# Altium PCB FLS HAMAMATSU_A Aug_14_2012.PcbDoc
Units mil, origin at the board's own origin, x right, y up, seen from the top; angles counter-clockwise.
Board outline 1329 x 1480 mil, 6 copper layers (Top Layer, Internal Plane 1, Mid-Layer 1, Mid-Layer 2, Internal Plane 2, Bottom Layer); 30 components, 21 nets, 94 pads, 5 vias.
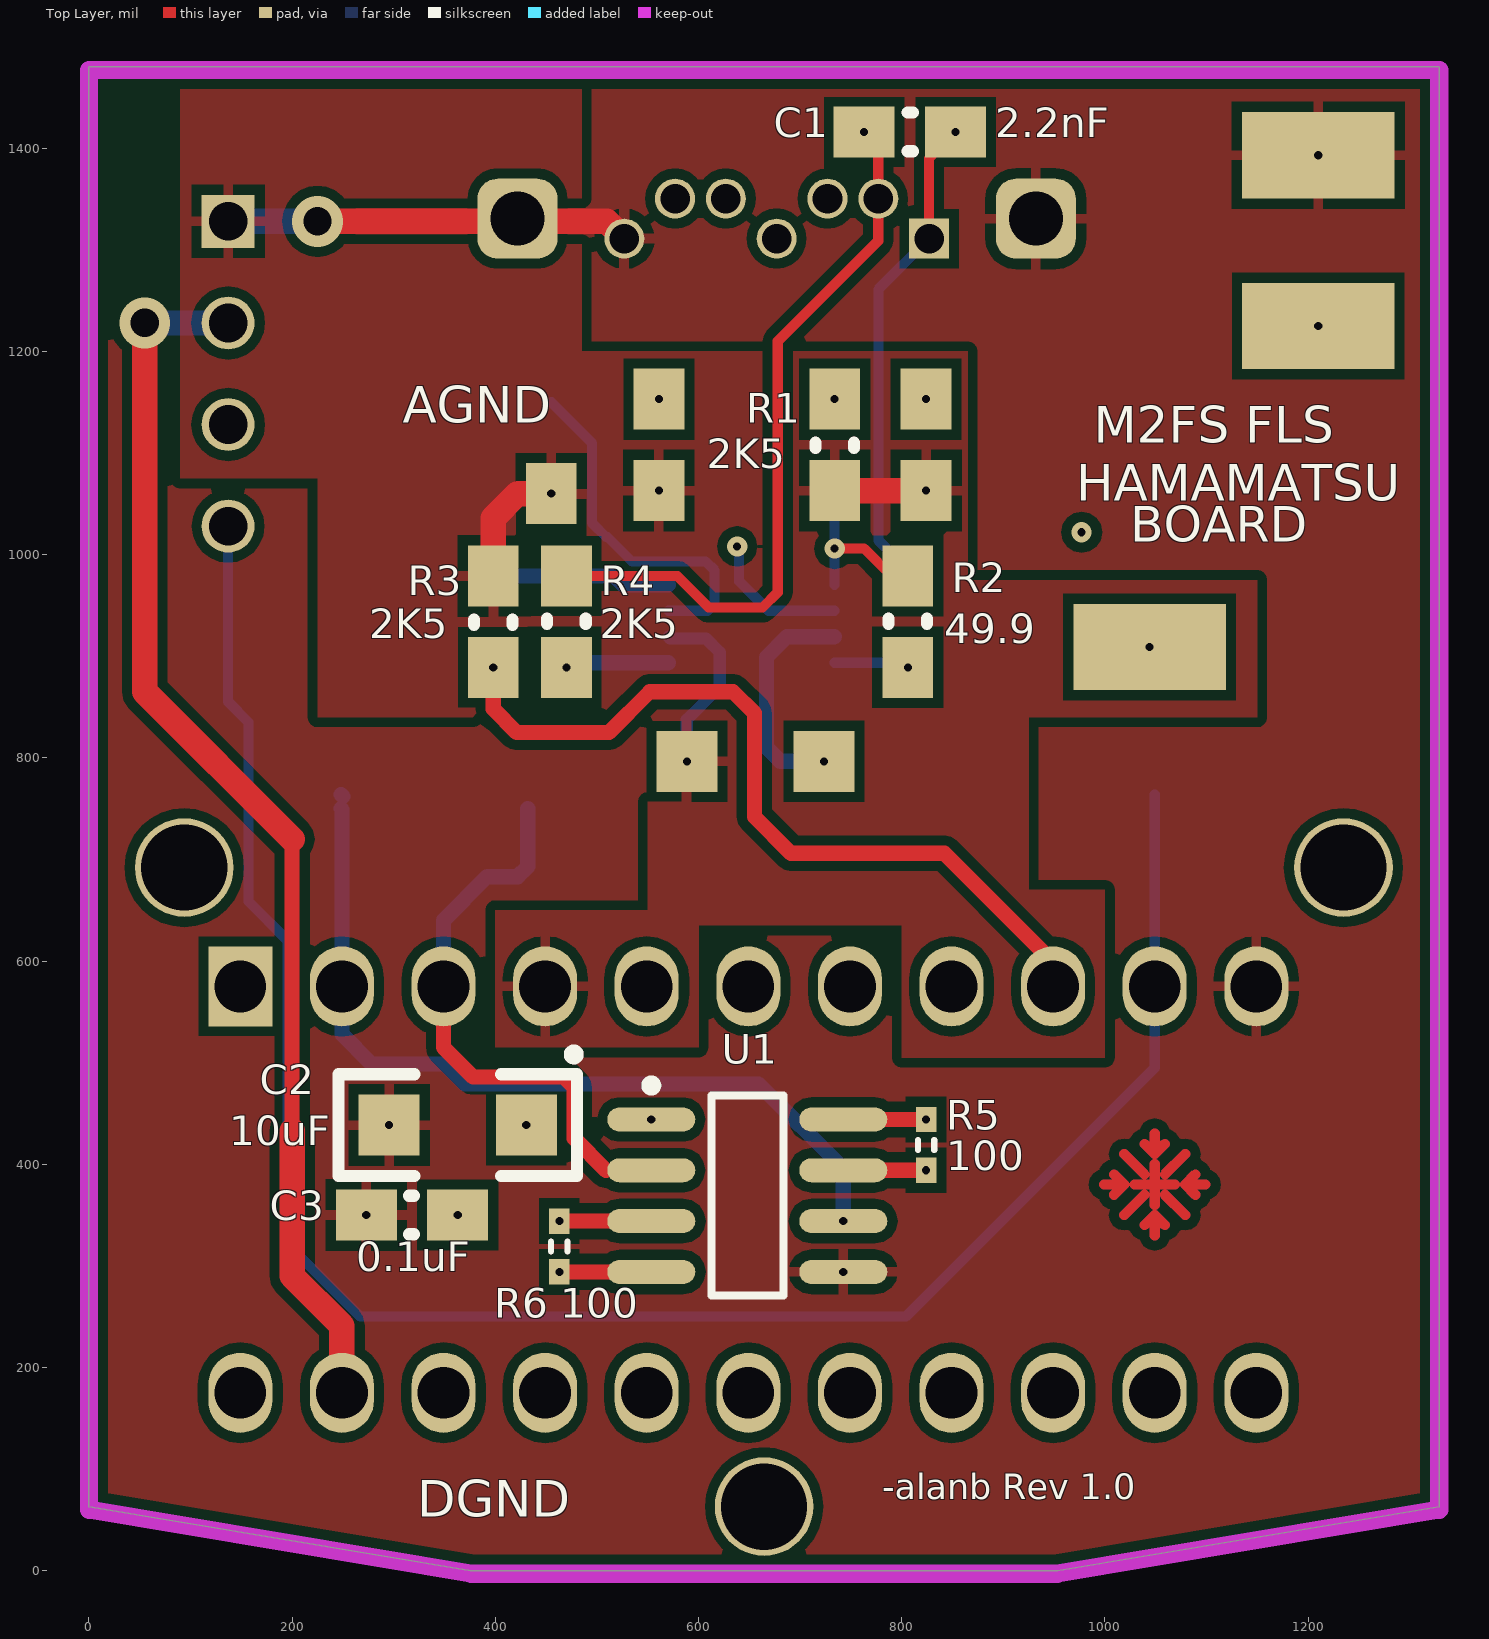
[diagram p0: Top Layer view]
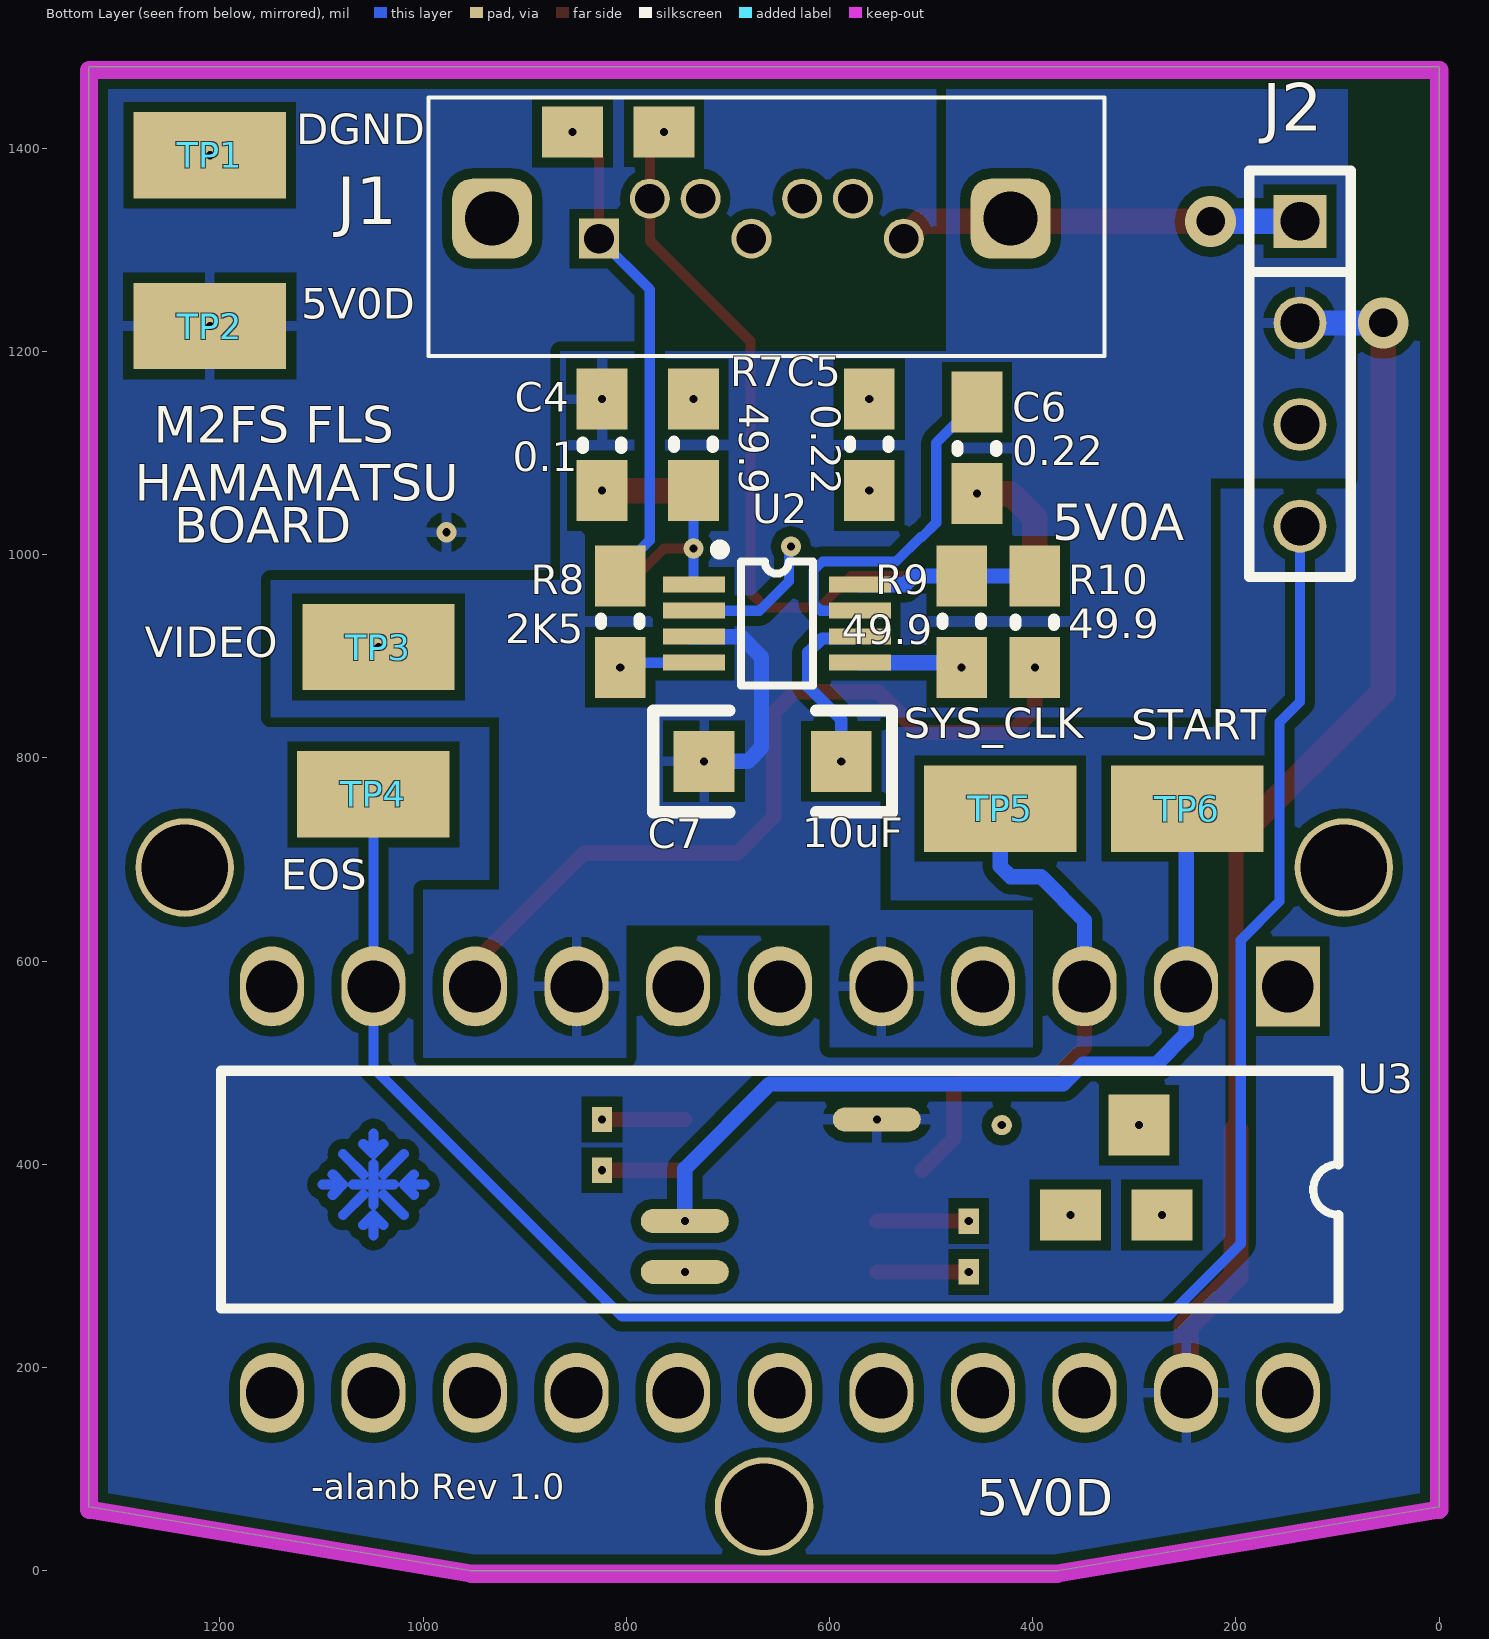
[diagram p1: Bottom Layer view, seen from below]
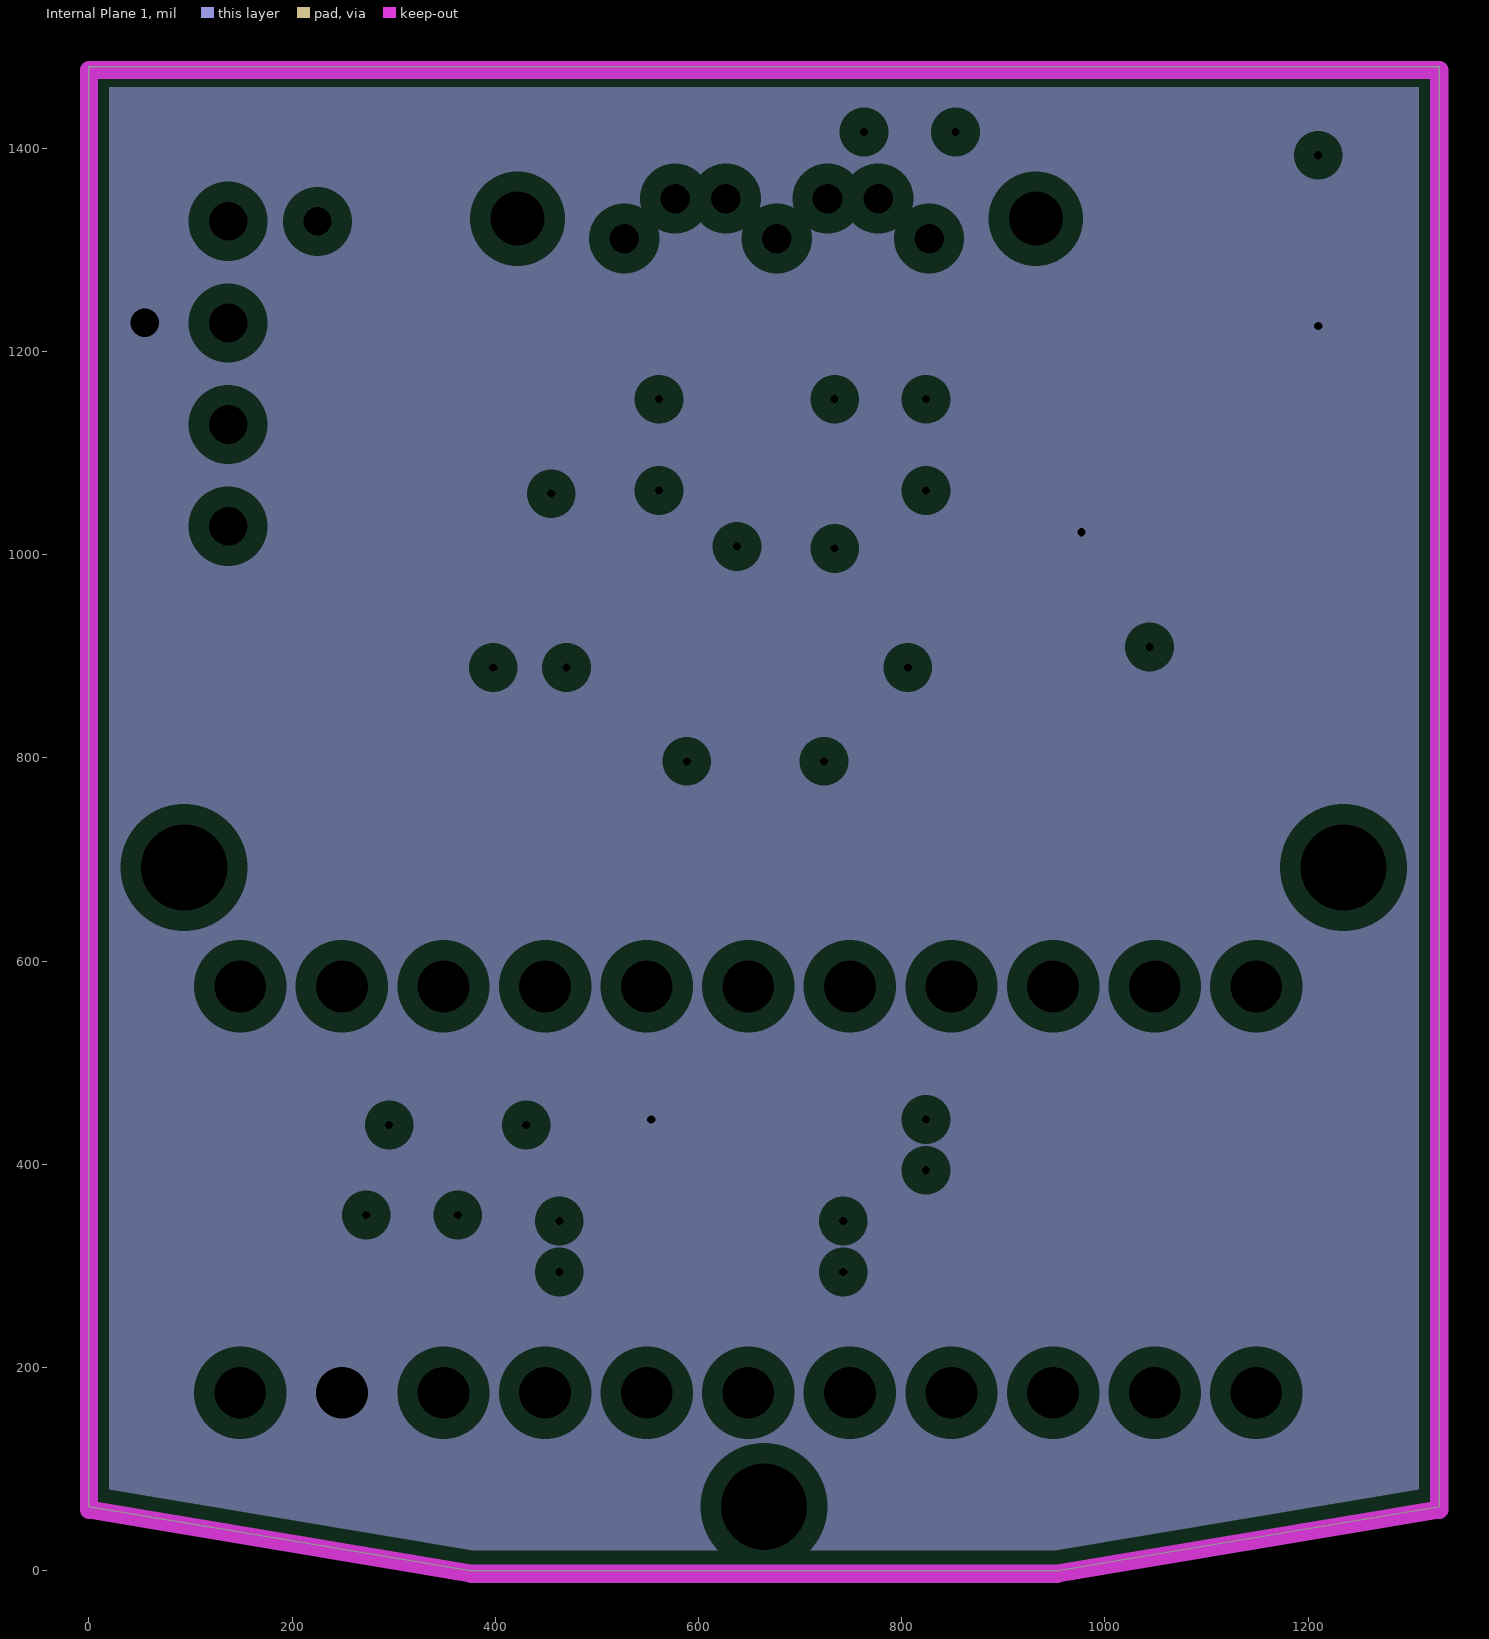
[diagram p2: Internal Plane 1, clearances drawn from the general rule]
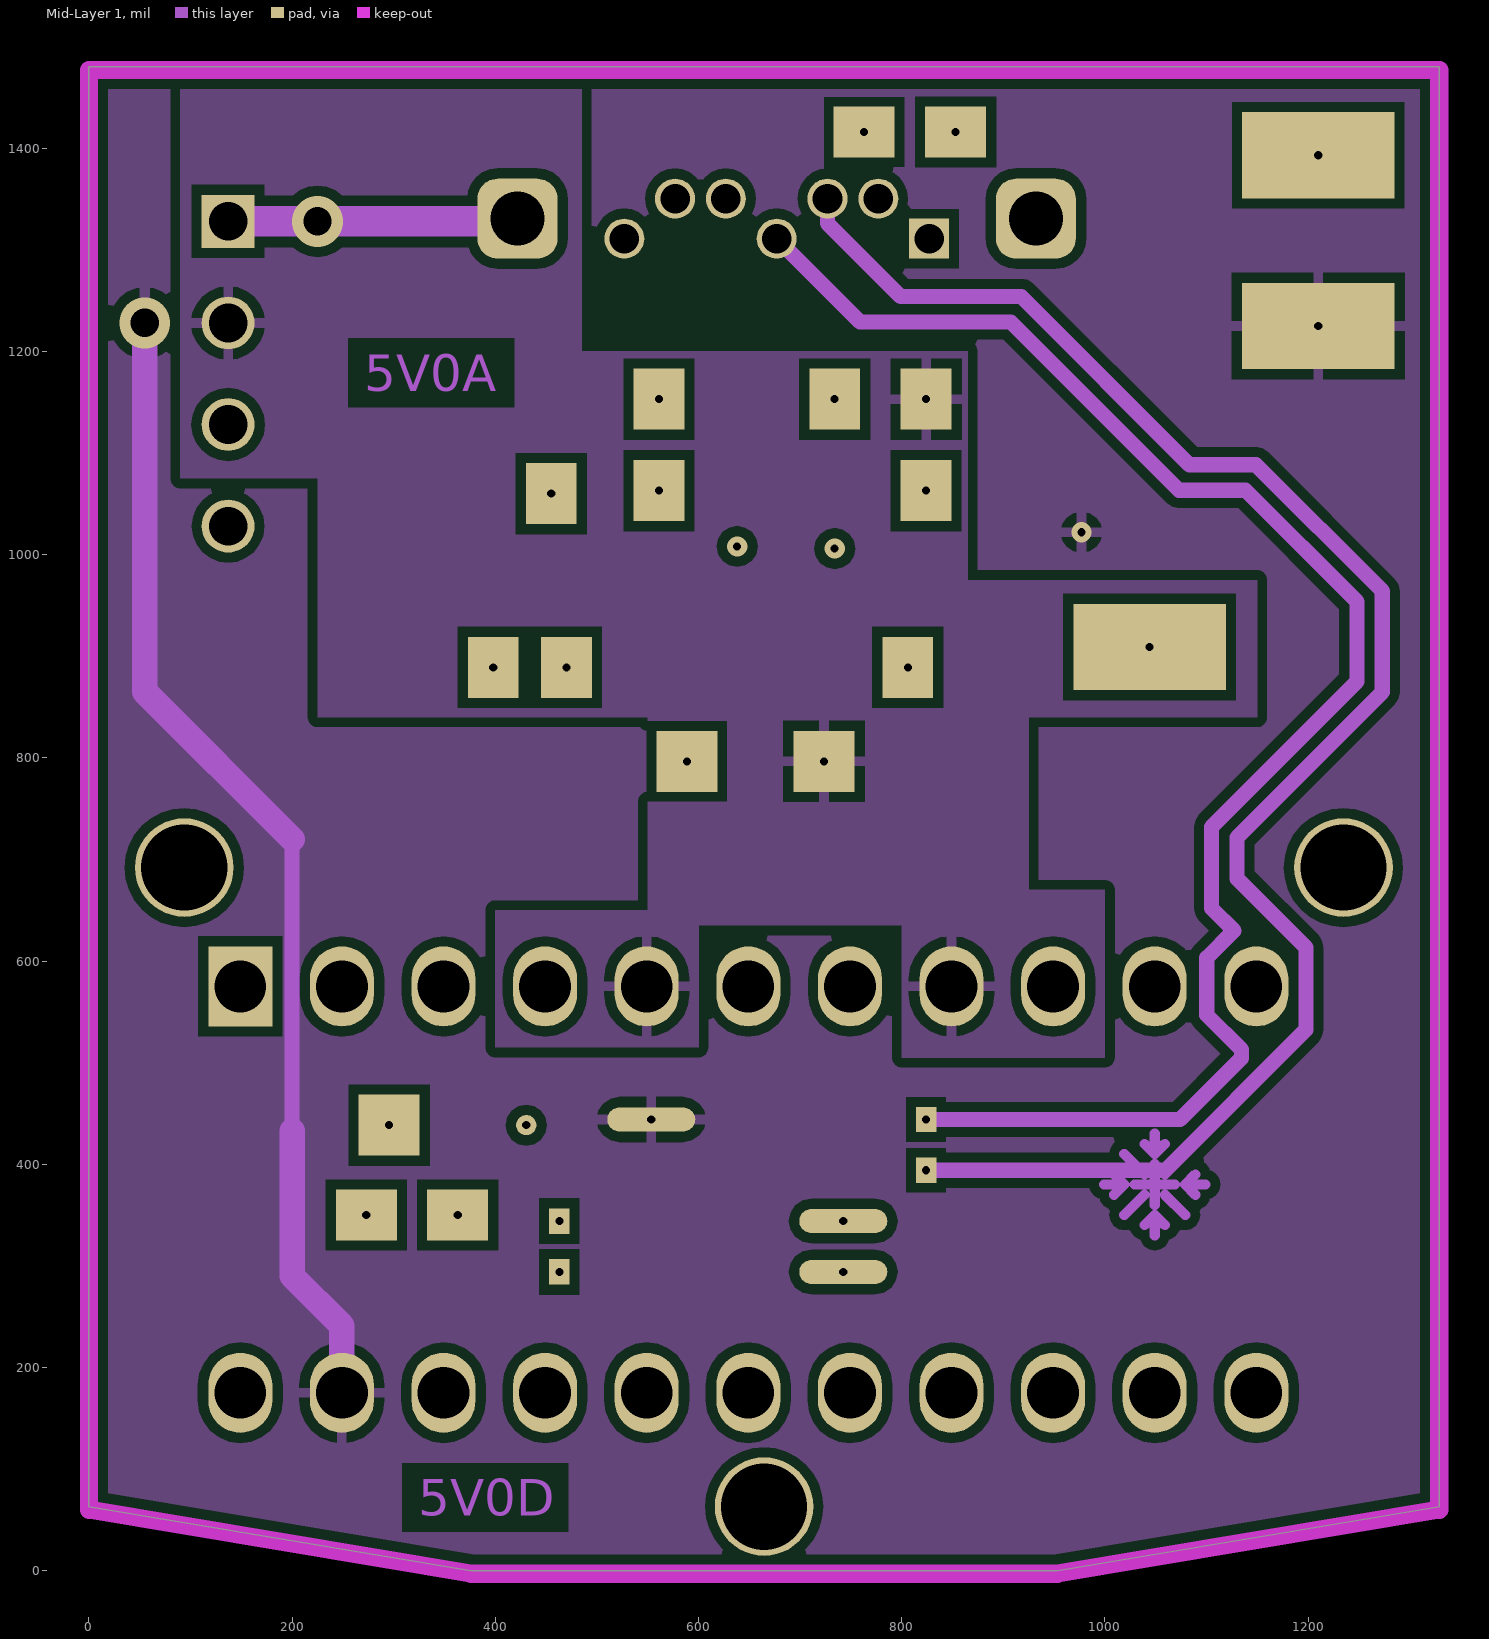
[diagram p3: Mid-Layer 1]
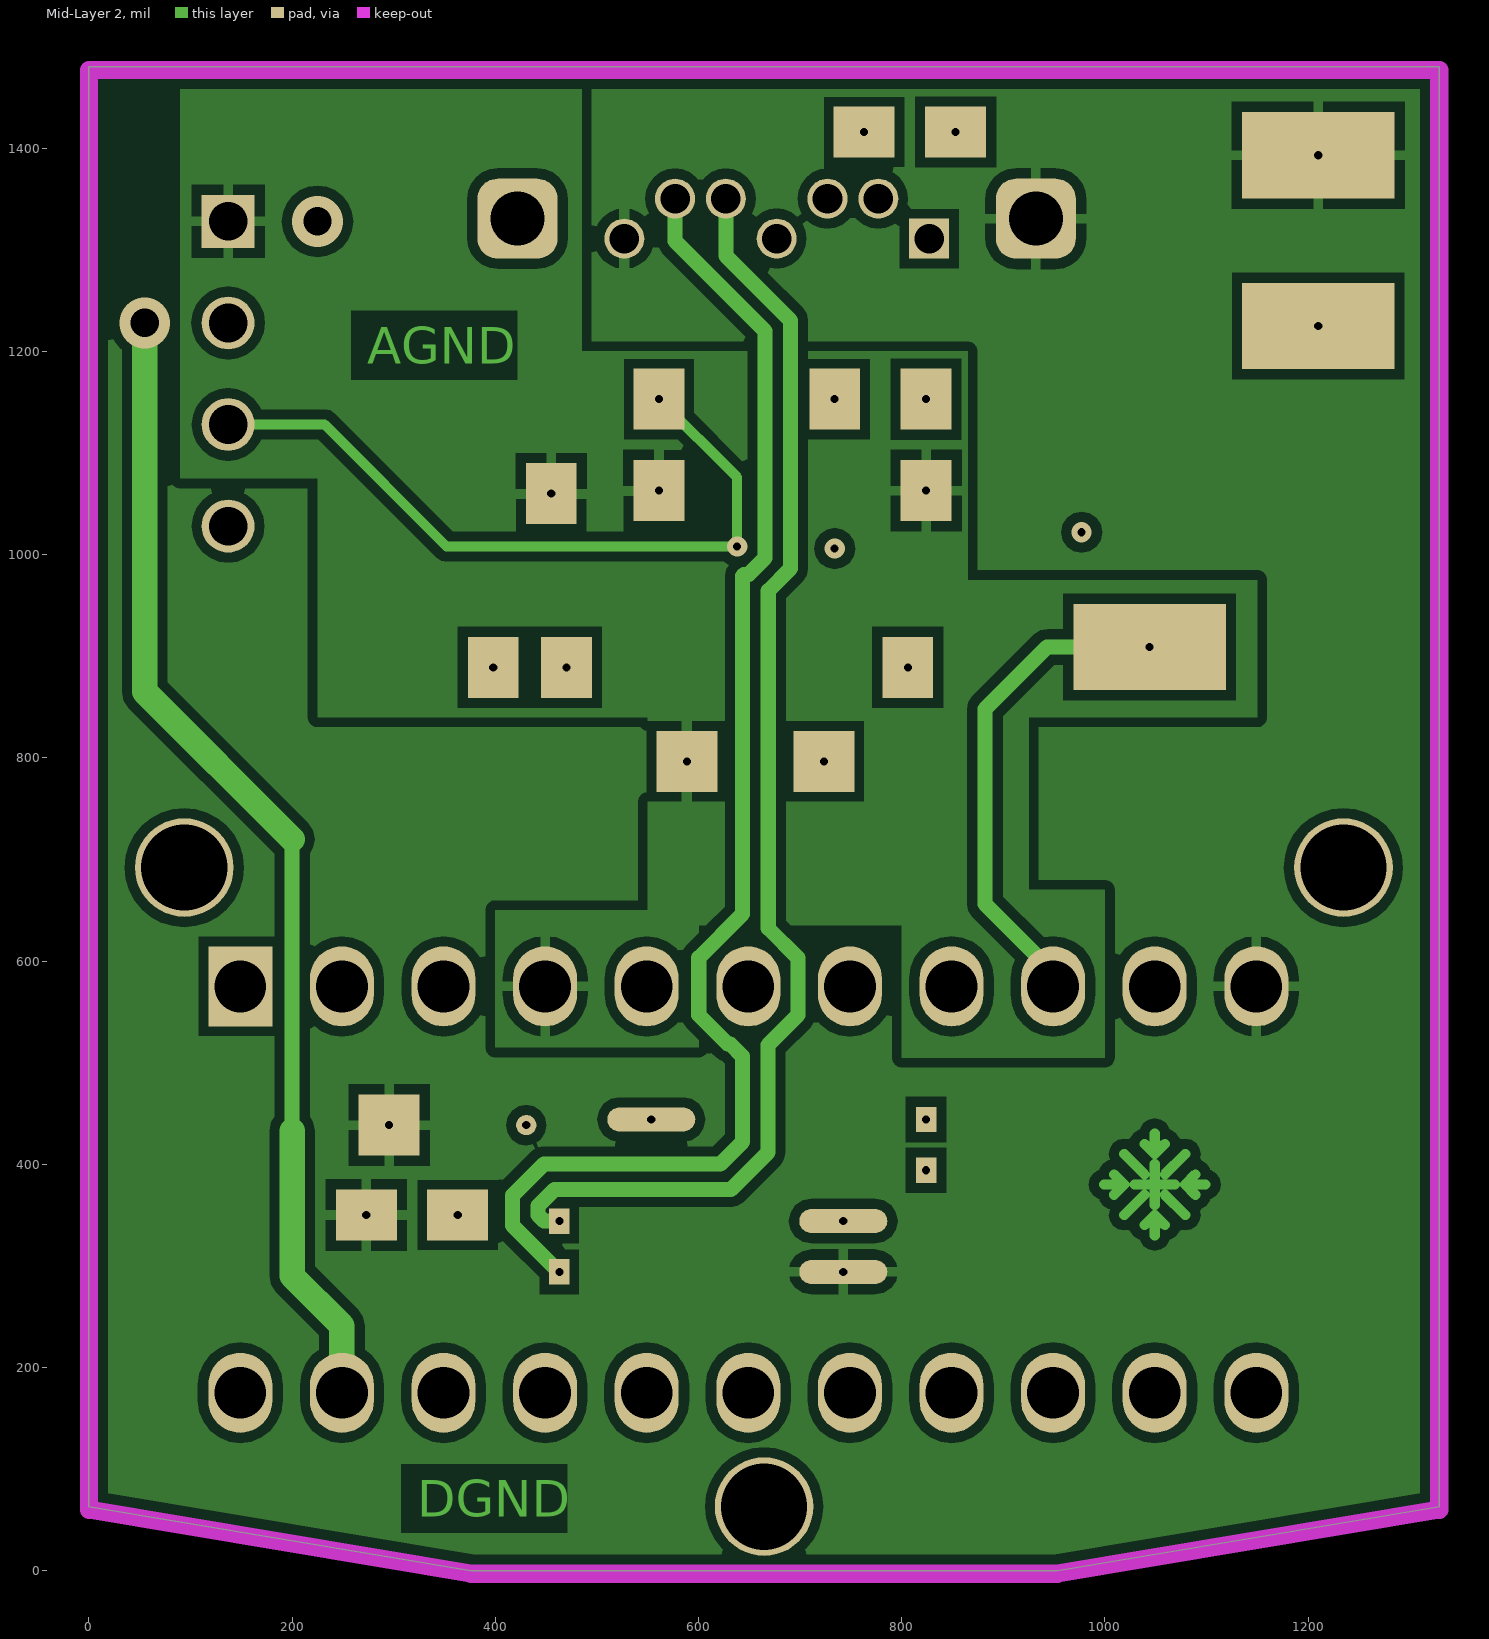
[diagram p4: Mid-Layer 2]
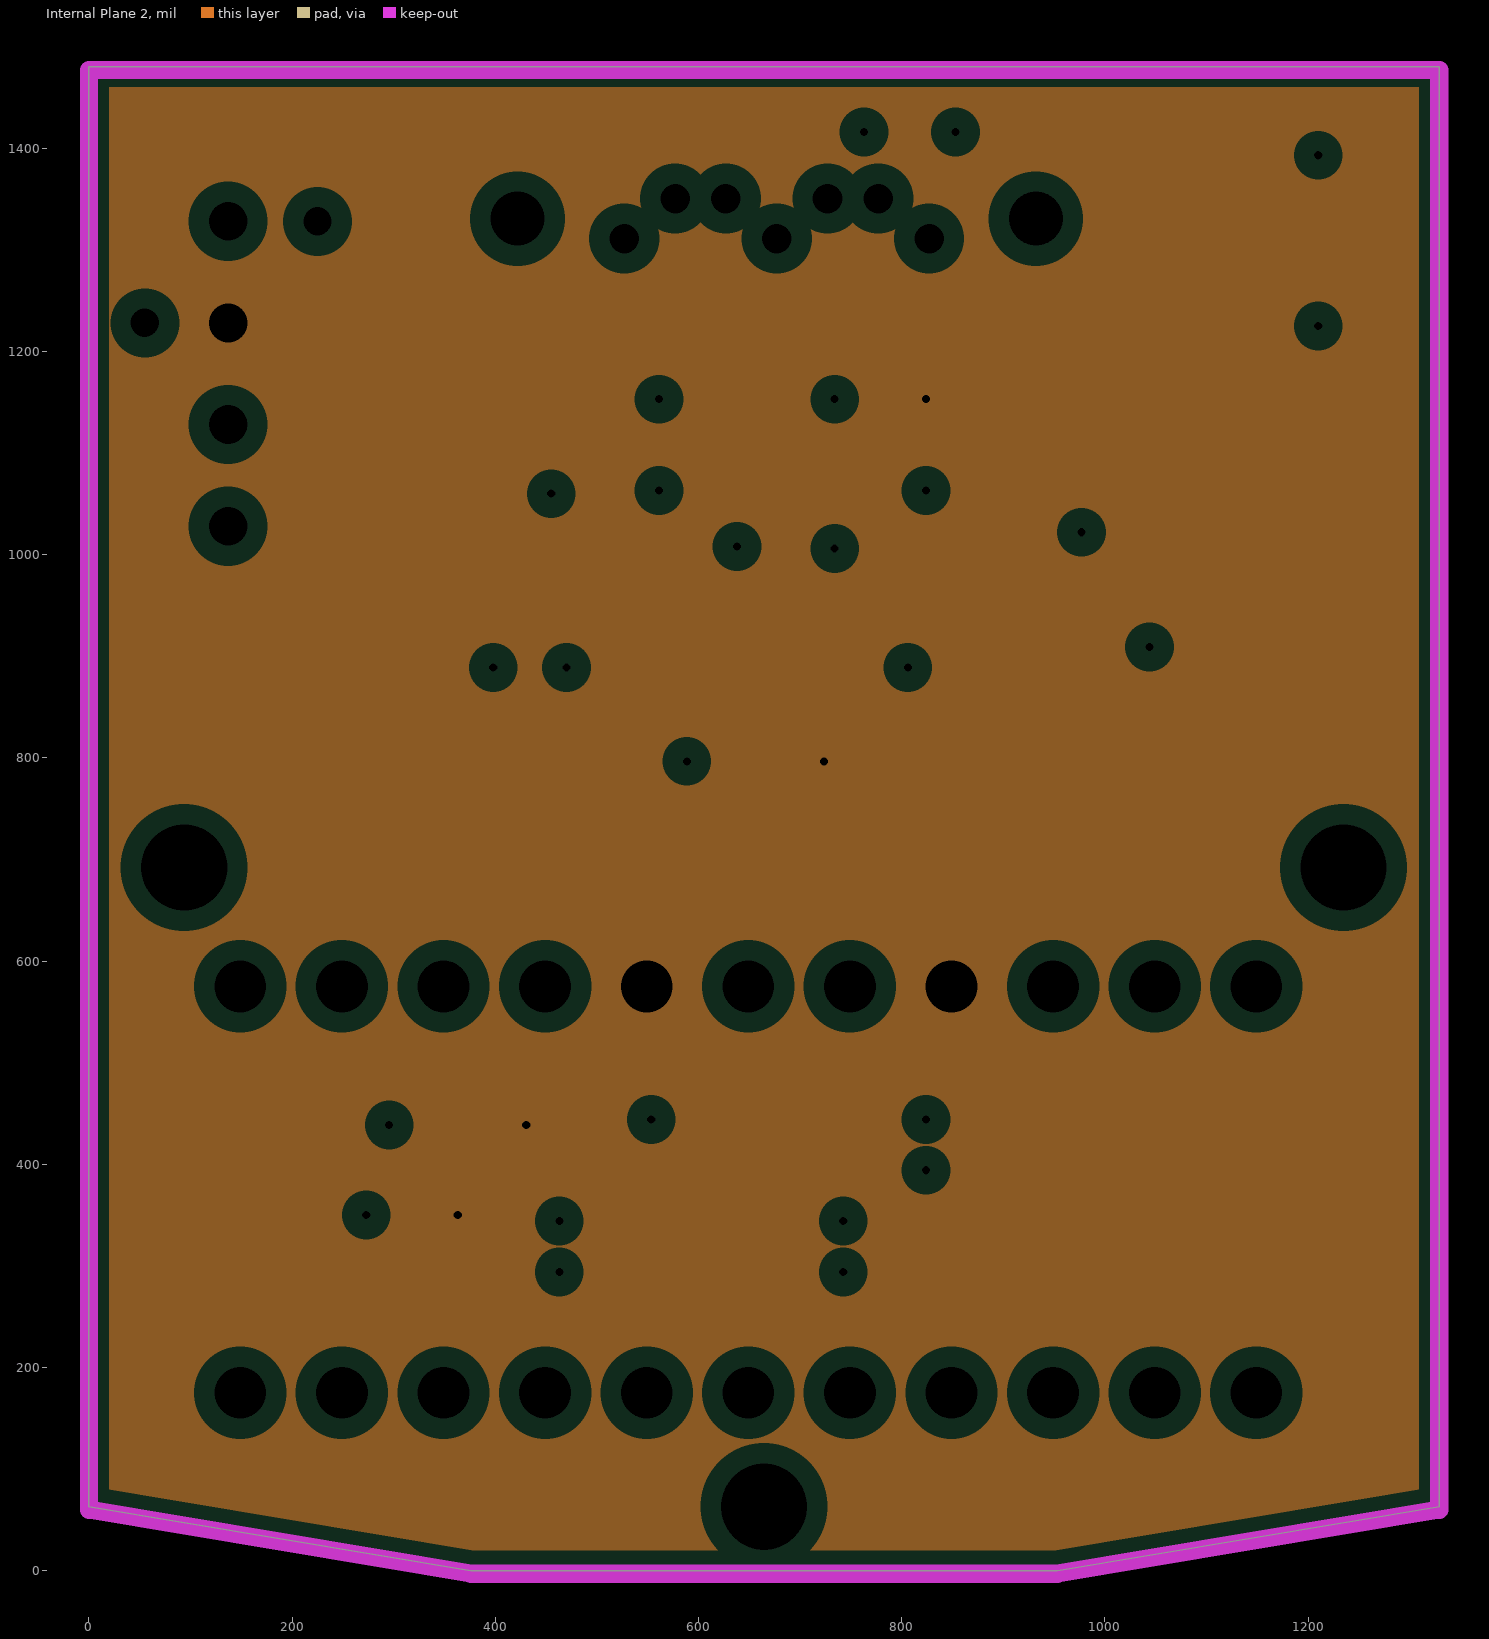
[diagram p5: Internal Plane 2, clearances drawn from the general rule]

## Layer stack, top to bottom
Top Layer: signal copper 1.4
Dielectric: core 12.6, FR-4, Dk 4.8
Internal Plane 1: plane copper 1.4, net 5V0D
Dielectric: prepreg 12.6, FR-4, Dk 4.8
Mid-Layer 1: signal copper 1.4
Dielectric: core 12.6, FR-4, Dk 4.8
Mid-Layer 2: signal copper 1.4
Dielectric: prepreg 12.6, FR-4, Dk 4.8
Internal Plane 2: plane copper 1.4, net 5V0A
Dielectric: core 12.6, FR-4, Dk 4.8
Bottom Layer: signal copper 1.4

## Board outline
0,63 376,0 953,0 1329,63 1329,1480 0,1480

## Design rules (kind name [scope] priority, off if disabled: settings)
Clearance [All] p1: gap=9.8
DiffPairsRouting [All] p1: maxlimit=10 minlimit=10 mostfreqgap=10 maxuncoupledlength=500
MinimumSolderMaskSliver [All] p1: minsoldermaskwidth=2
PlaneClearance [All] p1: clearance=20
PlaneConnect [All] p1: planeconnectstyle=Relief reliefexpansion=20 reliefentries=4 reliefconductorwidth=10 reliefairgap=10
PolygonConnect [All] p1: connectstyle=Relief reliefconductorwidth=10 reliefentries=4 polygonreliefangle="90 Angle" airgapwidth=10
RoutingVias [All] p1: holewidth=28 width=50 viastyle="Through Hole" minholewidth=28 minwidth=50 maxholewidth=28 maxwidth=50
ShortCircuit ShortCircuit_2 [InNet('AGND') vs InNet('DGND')] p1: allowed=TRUE
ShortCircuit [InNet('5V0A') vs InNet('5V0D')] p2: allowed=TRUE
SilkscreenOverComponentPads [All] p1: minsilkscreentomaskgap=2
SolderMaskExpansion [All] p1: expansion=4
Width [All] p1: maxlimit=30 minlimit=6 preferedwidth=10
22 further rules are at their usual default settings.

## Classes and differential pairs
differential pair "VIDEO A1": +"VIDEO A1_P" -"VIDEO A1_N"
differential pair SYS_CLK_A1: +SYS_CLK_A1_P -SYS_CLK_A1_N
differential pair START_A1: +START_A1_P -START_A1_N

## Components (designator, comment, footprint, x,y, rotation, side; value= is the part's Value field where it differs from the comment)
C1 "2.2nF" "0805 SLIM"#1 853,1416 r180 top locked (schematic designator C2)
C2 "10uF" 1206#1 363,439 r270 top locked (schematic designator C5)
C3 "0.1uF" "0805 SLIM"#1 273,350 r0 top locked (schematic designator C6)
C4 "0.1" "0805 SLIM"#1 824,1063 r90 bottom locked (schematic designator C7)
C5 "0.22" "0805 SLIM"#1 561,1153 r270 bottom (schematic designator C1)
C6 "0.22" "0805 SLIM"#2 455,1060 r90 bottom locked (schematic designator C3)
C7 "10uF" 1206#2 656,796 r90 bottom locked (schematic designator C4)
J1 "" "Molex 471554001" 932.04,1330.68 r180 bottom locked
J2 "WM6438-ND" SIP4 137,1328 r270 bottom locked
R1 "2K5" "0805 SLIM"#3 734,1063 r90 top locked (schematic designator R2)
R2 "49.9" "0805 SLIM"#3 806,979 r270 top locked (schematic designator R1)
R3 "2K5" "0805 SLIM"#4 398,889 r90 top locked (schematic designator R7)
R4 "2K5" "0805 SLIM"#3 470,979 r270 top locked (schematic designator R5)
R5 "100" "0402 slim" 824,444 r270 top locked (schematic designator R10)
R6 "100" "0402 SLIM" 463,294 r90 top locked (schematic designator R9)
R7 "49.9" "0805 SLIM"#4 734,1153 r270 bottom locked (schematic designator R4)
R8 "2K5" "0805 SLIM"#4 806,979 r270 bottom locked (schematic designator R3)
R9 "49.9" "0805 SLIM"#4 470,979 r270 bottom locked (schematic designator R8)
R10 "49.9" "0805 SLIM"#2 398,889 r90 bottom locked (schematic designator R6)
TP1 "DGND" TP-107#1 1210,1393 r0 bottom locked
TP2 "5V0D" TP-107#1 1210,1225 r0 bottom locked
TP3 "VIDEO" TP-107#1 1044,909 r0 bottom locked
TP4 "EOS" TP-107#2 960,680 r0 bottom locked
TP5 "SYS_CLK" TP-107#3 432,764 r0 bottom locked
TP6 "START" TP-107#4 248,763 r0 bottom locked
U1 "DS90C402M" M08A_N 648,369 r0 top locked (schematic designator U3)
U2 "TI THS4521" MSOP8 652,932 r270 bottom locked
U3 "Hamamatsu S10453-512Q" "HAMAMATSU 22" 149,575 r270 bottom locked (schematic designator U1)
? "" STARFLAKE 1049,380 r0 bottom locked
? "" STARFLAKE 1049,380 r180 top locked

## Footprints (in the part's own frame and the unit in brackets; to place one, negate y for a bottom-side part, rotate by r counter-clockwise, add the part's x,y. Pads: shape width x height; smd on the part's side, far side on the other; paste and mask are expansions set on the pad)
"0402 slim" [mil]
  rect 25x20 hole 8: 1(0,0) 2(50,0)
  silkscreen extent 20,-8 30,8
"0402 SLIM" [mil]
  rect 25x20 hole 8: 1(0,0) 2(50,0)
  silkscreen extent 20,-8 30,8
"0805 SLIM"#1 [mil]
  rect 60x50 hole 8: 1(0,0) 2(90,0)
  silkscreen extent 42,-19 47,19
"0805 SLIM"#2 [mil]
  rect 60x50 hole 8: 1(0,0)
  rect 60x50 smd: 2(90,0)
  silkscreen extent 42,-19 47,19
"0805 SLIM"#3 [mil]
  rect 60x50 smd: 1(0,0)
  rect 60x50 hole 8: 2(90,0)
  silkscreen extent 42,-19 47,19
"0805 SLIM"#4 [mil]
  rect 60x50 smd: 1(0,0) 2(90,0)
  silkscreen extent 42,-19 47,19
1206#1 [mil]
  rect 60x60 / inner round 20 / far side round 20 hole 8: 1(0.5,67.5)
  rect 60x60 hole 8: 2(0.5,-67.5)
  silkscreen extent -50,-118 51,118
1206#2 [mil]
  rect 60x60 hole 8: 1(0.5,67.5) 2(0.5,-67.5)
  silkscreen extent -50,-118 51,118
"HAMAMATSU 22" [mil]
  rect 78.74x63 hole 51: 1(0,0)
  oval 78.74x63 hole 51: 2(0,-100) 3(0,-200) 4(0,-300) 5(0,-400) 6(0,-500) 7(0,-600) 8(0,-700) 9(0,-800) 10(0,-900) 11(0,-1000) 12(400,-1000) 13(400,-900) 14(400,-800) 15(400,-700) 16(400,-600) 17(400,-500) 18(400,-400) 19(400,-300) 20(400,-200) 21(400,-100) 22(400,0)
  silkscreen extent 83,-1050 317,50
M08A_N [mm] "SOIC, 8-Leads, Body 4.9x3.9mm, Pitch 1.27mm, IPC Medium Density"
  oval 2.2x0.6 hole 0.203: 1(-2.4,1.905) 5(2.4,-1.905) 6(2.4,-0.635)
  oval 2.2x0.6 smd: 2(-2.4,0.635) 3(-2.4,-0.635) 4(-2.4,-1.905) 7(2.4,0.635) 8(2.4,1.905)
  silkscreen extent -2.52,-2.5 0.9,2.88, body extent -2,-2.5 2,2.5, height 1.75
"Molex 471554001" [mm] "CONN SATA HDR 7POS PCB VERT"
  rect 1x1 hole 0.74: 1(2.67,-0.5)
  round 1 hole 0.74: 2(3.94,0.5) 3(5.21,0.5) 4(6.48,-0.5) 5(7.75,0.5) 6(9.02,0.5) 7(10.29,-0.5)
  rrect50% 2x2 hole 1.35: 8(0,0) 9(12.96,0)
  silkscreen extent -1.59,-3.43 15.31,3.03
MSOP8 [mm] "Shrink Small Outline; 8 Leads; Body Width 3 mm; Pitch 0.65 mm"
  rect 0.4x1.55 smd: 1(-0.975,-2.075) 2(-0.325,-2.075) 3(0.325,-2.075) 4(0.975,-2.075) 5(0.975,2.075) 6(0.325,2.075) 7(-0.325,2.075) 8(-0.975,2.075)
  silkscreen extent -1.98,-1.55 1.55,0.9
SIP4 [mil]
  rect 52x52 hole 38: 1(0,0)
  round 52 hole 38: 2(100,0) 3(200,0) 4(300,0)
  silkscreen extent -50,-50 350,50
STARFLAKE [mil]
  Multi-Layer lines w10: -50,0 -30,0 ; -40,10 -30,0 ; -40,-10 -30,0 ; -30,30 -10,10 ; -30,-30 -10,-10 ; -20,0 0,0 ; -10,40 0,30 ; -10,-40 0,-30 ; 0,50 0,30 ; 0,20 0,0 ; 0,-20 0,0 ; 0,-50 0,-30 ; 10,40 0,30 ; 10,10 30,30 ; 10,-10 30,-30 ; 10,-40 0,-30 ; 20,0 0,0 ; 40,10 30,0 ; 40,-10 30,0 ; 50,0 30,0
TP-107#1 [mil]
  rect 150x85 hole 8: 1(0,0)
TP-107#2 [mil]
  rect 150x85 smd: 1(89,-84)
TP-107#3 [mil]
  rect 150x85 smd: 1(0,14)
TP-107#4 [mil]
  rect 150x85 smd: 1(0,13)

## Part data
C1 C3 C4 C5 C6: library part Cap, "Capacitor"
C2 C7: library part "Cap Pol3", "Polarized Capacitor (Surface Mount)"
J1: library part CL586-0535-5
J2: library part CON3
R1 R2 R3 R4 R7 R8 R9 R10: library part Res1, "Resistor"
R5 R6: library part RES1
U1: "Dual Low Voltage Differential Signaling (LVDS) Receiver, 8-pin Narrow SOIC"
U3: library part Hamamatsu, "Linear Image Sensor"

## Free pads (board coordinates)
  round 97 hole 85: 1(93.8,692) 2(1234.8,692) 3(664.5,63)

## Via types
v1: diameter 20, hole 8, Top Layer to Bottom Layer, 3 vias
v2: diameter 50, hole 28, Top Layer to Bottom Layer, 2 vias

## Nets (pads, with @x,y where several pads share a name; then routed paths per layer and width w, separated by ;. In a path a pad name is that pad's centre, name@x,y a point inside that pad or via, vN(x,y) a via of type N, cw(c..) or ccw(c..) an arc to the next point about the centre after c; other vN are vias at no path point)
5V0A: C2.1 C3.2 C4.2 C7.1 J2.2 U2.3 U3.5 U3.8 | length 308.2
  Bottom Layer w15: C7.1 680.5,796.5 667,810 667,899 687.2,919.2 U2.3
  Bottom Layer w25: 55,1228 J2.2
5V0D: TP2.1 U1.1 U3.21 | length 3400.1
  Top Layer w15: 200,433 200,720
  Top Layer w25: v2(55,1228) 55,865 200,720 ; 200,433 200,290 249,241 U3.21
  Mid-Layer 1 w15: 200,433 200,720
  Mid-Layer 1 w25: v2(55,1228) 55,865 200,720 ; 200,433 200,290 249,241 U3.21
  Mid-Layer 2 w15: 200,433 200,720
  Mid-Layer 2 w25: v2(55,1228) 55,865 200,720 ; 200,433 200,290 249,241 U3.21
  other v1: 977,1022
AGND: C4.1 C5.2 C6.1 C7.2 J2.1 R1.1 R3.2 U2.6 U3.4 | length 677.7
  Top Layer w25: R3.2 398,1036 422,1060 C6.1 ; R1.1 C4.1
  Mid-Layer 1 w30: J2.1 419.12,1328 421.8,1330.69
  Bottom Layer w12: U2.6 572.02,917.49 607.45,917.49 620.97,903.97 620.97,869.97 588.5,837.5 C7.2
DGND: C2.2 C3.1 J1.7 J1.8 J1.9 TP1.1 U1.5 U3.11 | length 401.8
  Top Layer w25: v2(225,1328) 509.92,1328 J1.7
  Bottom Layer w25: 137,1328 v2(225,1328) v2@229.8,1328
EOS_A1: J2.4 TP4.1 U3.10 | length 1984.3
  Bottom Layer w10: J2.4 137,855.1 157.1,835 157.1,658.7 195.3,620.5 195.3,321.7 267,250 804,250 1049,495 U3.10 TP4.1
NetR1_1: R2.1 R7.2 U2.1 | length 175.9
  Top Layer w10: v1(734,1006) 763,1006 790,979 R2.1
  Bottom Layer w10: U2.1 734,970.69 v1(734,1006) R7.2
NetR1_2: R2.2 R8.2 U2.4 | length 74.2
  Bottom Layer w10: U2.4 801.39,893.61 R2.2
NetR2_2: R1.2 R7.1
NetR5_2: R4.2 R9.2 U2.5 | length 102.2
  Bottom Layer w15: R4.2 474.61,893.61 U2.5
NetR6_2: R9.1 R10.2 U2.8 | length 175.9
  Bottom Layer w15: R10.2 R9.1 517,979 525.61,970.39 U2.8
PD/: C6.2 U2.7 | length 356.5
  Bottom Layer w10: C6.2 495,1110 495,1031.41 509,1017.41 510.41,1017.41 534.56,993.26 607.03,993.26 615.82,984.47 615.82,951.82 608.79,944.79 U2.7
START_A1: TP6.1 U1.6 U3.2 | length 825.1
  Bottom Layer w15: TP6.1 249,749 U3.2 249,528 278.34,498.66 350.34,498.66 370,479 659,479 742.49,395.51 U1.6 ; TP6.1@248,764 TP6.1@250,762
START_A1_N: J1.4 R5.1 U1.8 | length 1678.8
  Top Layer w15: U1.8 R5.1
  Mid-Layer 1 w15: J1.4 758.92,1229 907.32,1229 1072.98,1063.34 1138.31,1063.34 1248,953.64 1248,875 1105,732 1105,651.88 1127,629.88 1100.2,603.08 1100.2,546.92 1134.32,512.79 1134.32,504.32 1074,444 R5.1
START_A1_P: J1.3 R5.2 U1.7 | length 1751.9
  Top Layer w15: U1.7 R5.2
  Mid-Layer 1 w15: J1.3 726.92,1326.08 799,1254 917.68,1254 1083.34,1088.34 1148.66,1088.34 1273,964 1273,864.64 1130,721.64 1130,681 1197.8,613.2 1197.8,532.44 1059.36,394 R5.2
SYS_CLK_A1_N: J1.6 R6.1 U1.4 | length 1447.3
  Top Layer w15: R6.1 U1.4
  Mid-Layer 2 w15: R6.1 462.64,294 424.32,332.32 417,339.64 417,369.36 424.32,376.68 447.81,400.16 621.48,400.16 643.32,422 643.32,506.2 631.2,518.33 628.79,518.33 600.2,546.92 600.2,603.08 643.32,646.21 643.32,978.96 644.86,980.5 649.39,980.5 665.5,996.61 665.5,1220.14 576.92,1308.72 J1.6
SYS_CLK_A1_P: J1.5 R6.2 U1.3 | length 1369.5
  Top Layer w15: R6.2 U1.3
  Mid-Layer 2 w15: R6.2 448,344 442,350 442,359 458.16,375.16 631.84,375.16 668.32,411.64 668.32,517.44 697.8,546.92 697.8,603.08 668.62,632.26 668.62,964.38 690.5,986.25 690.5,1029.75 690.5,1230.5 626.92,1294.08 J1.5
SYSCLK: TP5.1 U1.2 U3.3 | length 526.6
  Top Layer w15: U3.3 349,515 378.2,485.8 467.67,485.8 477.8,475.67 477.8,425.2 509,394
  Bottom Layer w15: U3.3 349,640 392,683 422,683 432,693 TP5.1
"VIDEO A1": R3.1 R10.1 TP3.1 U3.9 | length 1300.1
  Top Layer w15: R10.1 398,848 421,825 512,825 552,865 634,865 655,844 655,742 691,706 842.05,706 949,599.05 U3.9
  Mid-Layer 2 w15: U3.9 949,589 882,656 882,848 943,909 TP3.1
"VIDEO A1_N": C1.2 J1.2 R4.1 | length 726.8
  Top Layer w10: R4.1 579,979 610,948 663,948 678,963 678,1210 776.92,1308.92 J1.2 776.92,1402.08 C1.2
"VIDEO A1_P": C1.1 J1.1 R8.1 | length 480.5
  Top Layer w10: J1.1 826.92,1389.92 C1.1
  Bottom Layer w10: R8.1 806,985 777,1014 777,1261.08 J1.1
VOCM: C5.1 J2.3 U2.2 | length 868.3
  Mid-Layer 2 w10: J2.3 232,1128 352,1008 v1(638,1008) 638,1076 C5.1
  Bottom Layer w10: v1(638,1008) 640,1006 640,973.79 669,944.79 U2.2
pads on no net: U3.1 U3.6 U3.7 U3.12 U3.13 U3.14 U3.15 U3.16 U3.17 U3.18 U3.19 U3.20 U3.22

## Polygon pours and split planes (outlines as drawn)
5V0A on Bottom Layer "Bottom Layer - 5V0A" (solid, remove dead copper, pour order 43): 485,1480 485,1200 865,1200 865,975 1150,975 1150,840 925,840 925,670 1000,670 1000,505 800,505 800,635 600,635 600,515 400,515 400,650 550,650 550,840 225,840 225,1075 90,1075 90,1480
5V0D on Bottom Layer "Bottom Layer- 5V0D" (solid, remove dead copper, pour order 47): 0.29,1479.45 1330.29,1479.45 1330.29,63.07 954,0.1 376.57,0.1 0.29,63.07
DGND on Top Layer "Top Layer- DGND" (solid, remove dead copper, pour order 51): 0.29,1479.45 1330.29,1479.45 1330.29,63.07 954,0.1 376.57,0.1 0.29,63.07
AGND on Top Layer "Top Layer- AGND" (solid, remove dead copper, pour order 46): 485,1480 485,1200 865,1200 865,975 1150,975 1150,840 925,840 925,670 1000,670 1000,505 800,505 800,635 600,635 600,515 400,515 400,650 550,650 550,840 225,840 225,1075 90,1075 90,1480
DGND on Mid-Layer 2 "Mid-Layer 2 - DGND" (solid, remove dead copper, pour order 44): 0.29,1479.45 1330.29,1479.45 1330.29,63.07 954,0.1 376.57,0.1 0.29,63.07
AGND on Mid-Layer 2 "Mid Layer 2- AGND" (solid, remove dead copper, pour order 44): 485,1480 485,1200 865,1200 865,975 1150,975 1150,840 925,840 925,670 1000,670 1000,505 800,505 800,635 600,635 600,515 400,515 400,650 550,650 550,840 225,840 225,1075 90,1075 90,1480
5V0A on Mid-Layer 1 "Mid-Layer 1- 5V0A" (solid, remove dead copper, pour order 45): 485,1480 485,1200 865,1200 865,975 1150,975 1150,840 925,840 925,670 1000,670 1000,505 800,505 800,635 600,635 600,515 400,515 400,650 550,650 550,840 225,840 225,1075 90,1075 90,1480
5V0D on Mid-Layer 1 "Mid Layer 1- 5V0D" (solid, remove dead copper, pour order 49): 0.29,1479.45 1330.29,1479.45 1330.29,63.07 954,0.1 376.57,0.1 0.29,63.07
5V0D on Internal Plane 1 (split plane): 1308.9,80.01 951.33,20.1 377.67,20.1 20.1,80.01 20.1,1459.9 1308.9,1459.9
5V0A on Internal Plane 2 (split plane): 1308.9,80.01 951.33,20.1 377.67,20.1 20.1,80.01 20.1,1459.9 1308.9,1459.9

## Keep-outs
Keep-Out Layer:
  lines w18: 0,60 0,1477 1329,1477 1329,60 953,-3 376,-3 0,60

## Other copper
Mid-Layer 1:
  text "5V0A" at 271,1161 h36
  text "5V0D" at 324,54 h36
Mid-Layer 2:
  text "AGND" at 274,1188 h36
  text "DGND" at 323,53 h36

## Silkscreen, mask and mechanical layers (free items; w line width, h text height)
Top Overlay:
  lines w9.84: 480,504 cw(c477.2,508.05) 480.68,504.57
  text "AGND" at 309,1130 h36
  text "M2FS FLS" at 989,1110 h36
  text "HAMAMATSU" at 972,1053 h36
  text "BOARD" at 1025,1001 h60
  text "-alanb Rev 1.0" at 781,70 h25
  text "DGND" at 323,53 h36
Bottom Overlay:
  text "M2FS FLS" at 1265,1110 h36
  text "HAMAMATSU" at 1284,1053 h36
  text "5V0A" at 381,1014 h36
  text "BOARD" at 1245,1000 h60
  text "-alanb Rev 1.0" at 1110,70 h25
  text "5V0D" at 455,54 h36
Mechanical 1:
  circle w3.94: c1149,575 r20
  circle w3.94: c149,575 r20
  lines w3.94: 1184,-287 1184,-286 ; 0,63 376,0 953,0 1329,63 1329,1480 0,1480 0,63